# Altium PCB galileoAdapter.PcbDoc
Units mil, origin at the board's own origin, x right, y up, seen from the top; angles counter-clockwise.
Board outline 2650 x 2050 mil, 2 copper layers (Top Layer, Bottom Layer), stack 65.792 mil thick; 18 components, 32 nets, 671 pads, 0 vias.
Unrouted connection lines stored in the file: 5.
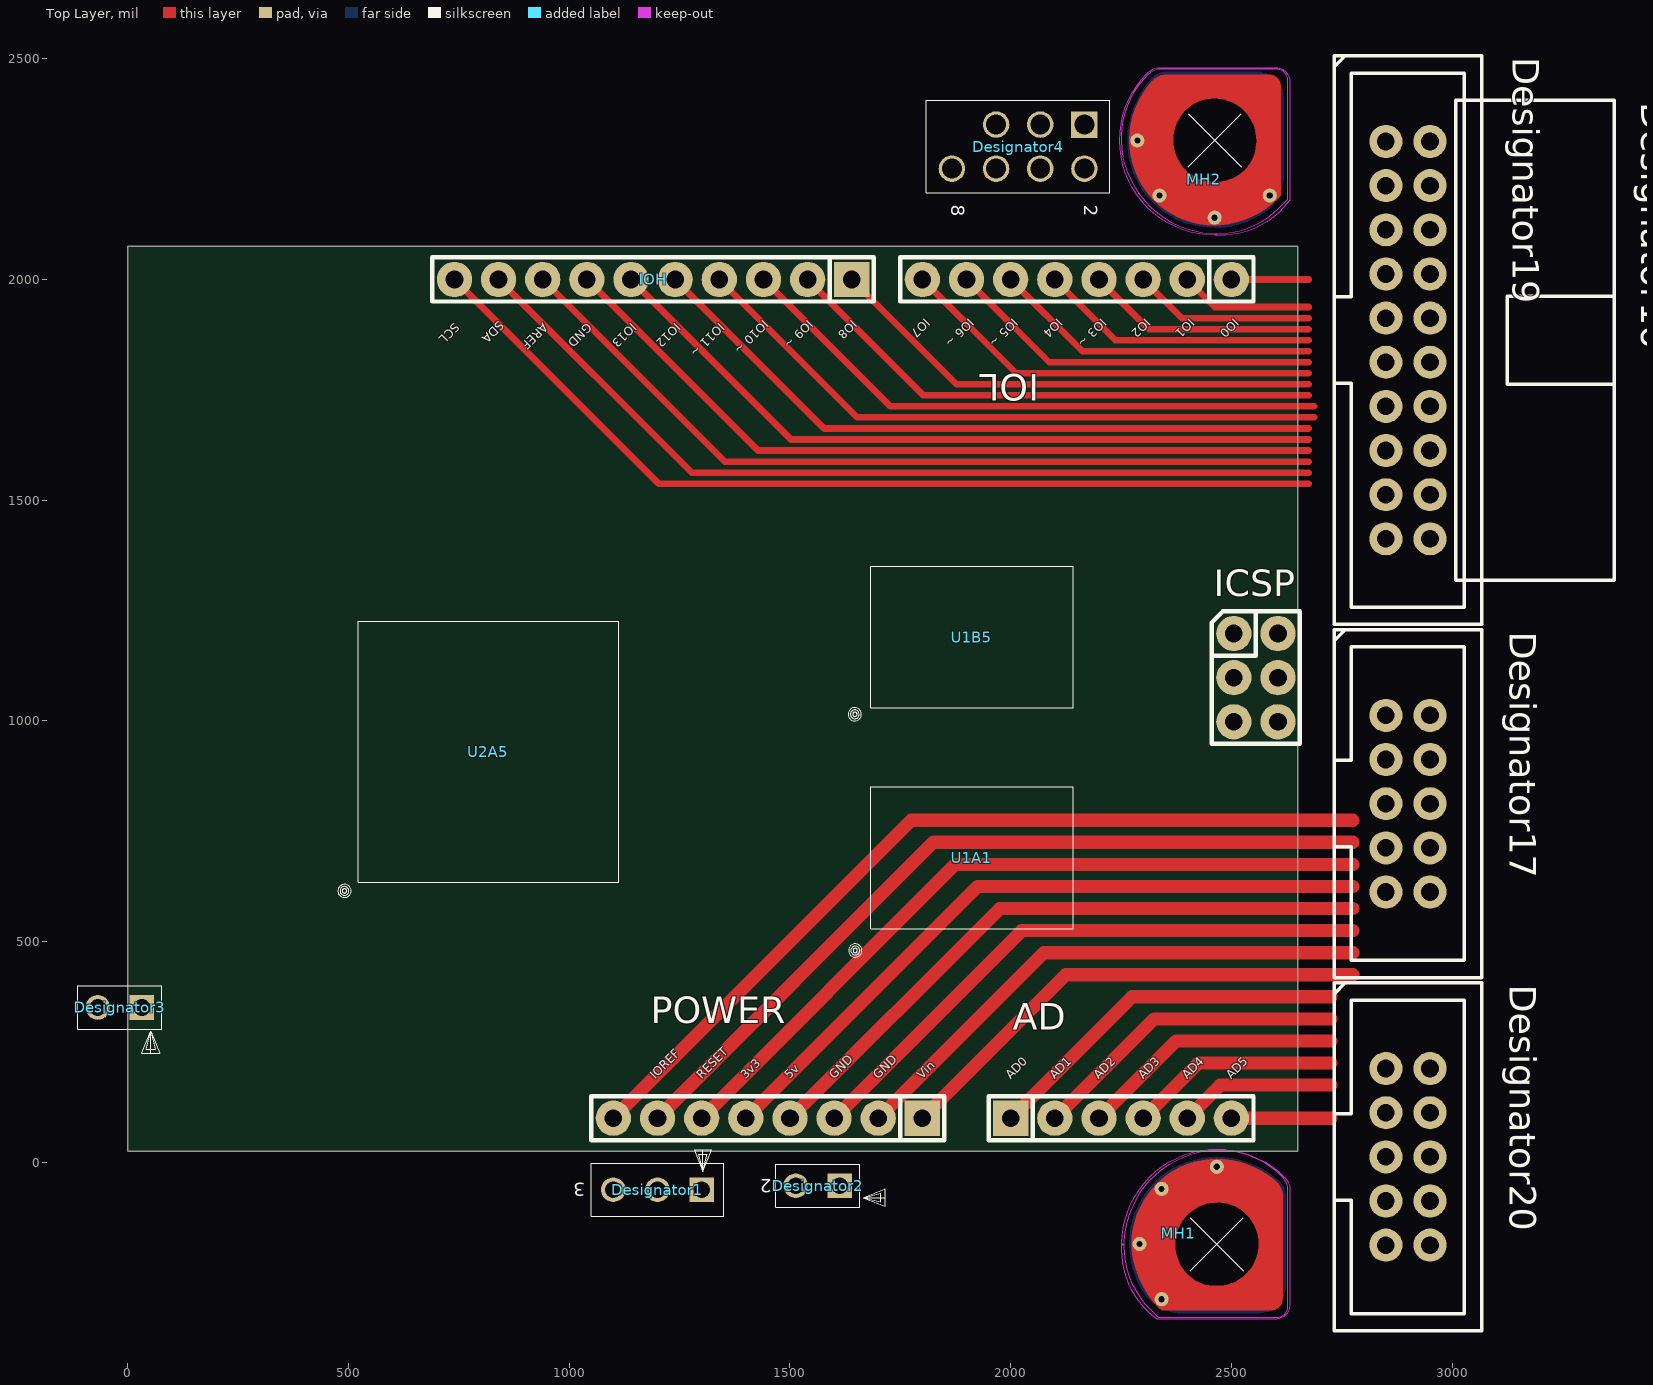
[diagram p0: Top Layer view]
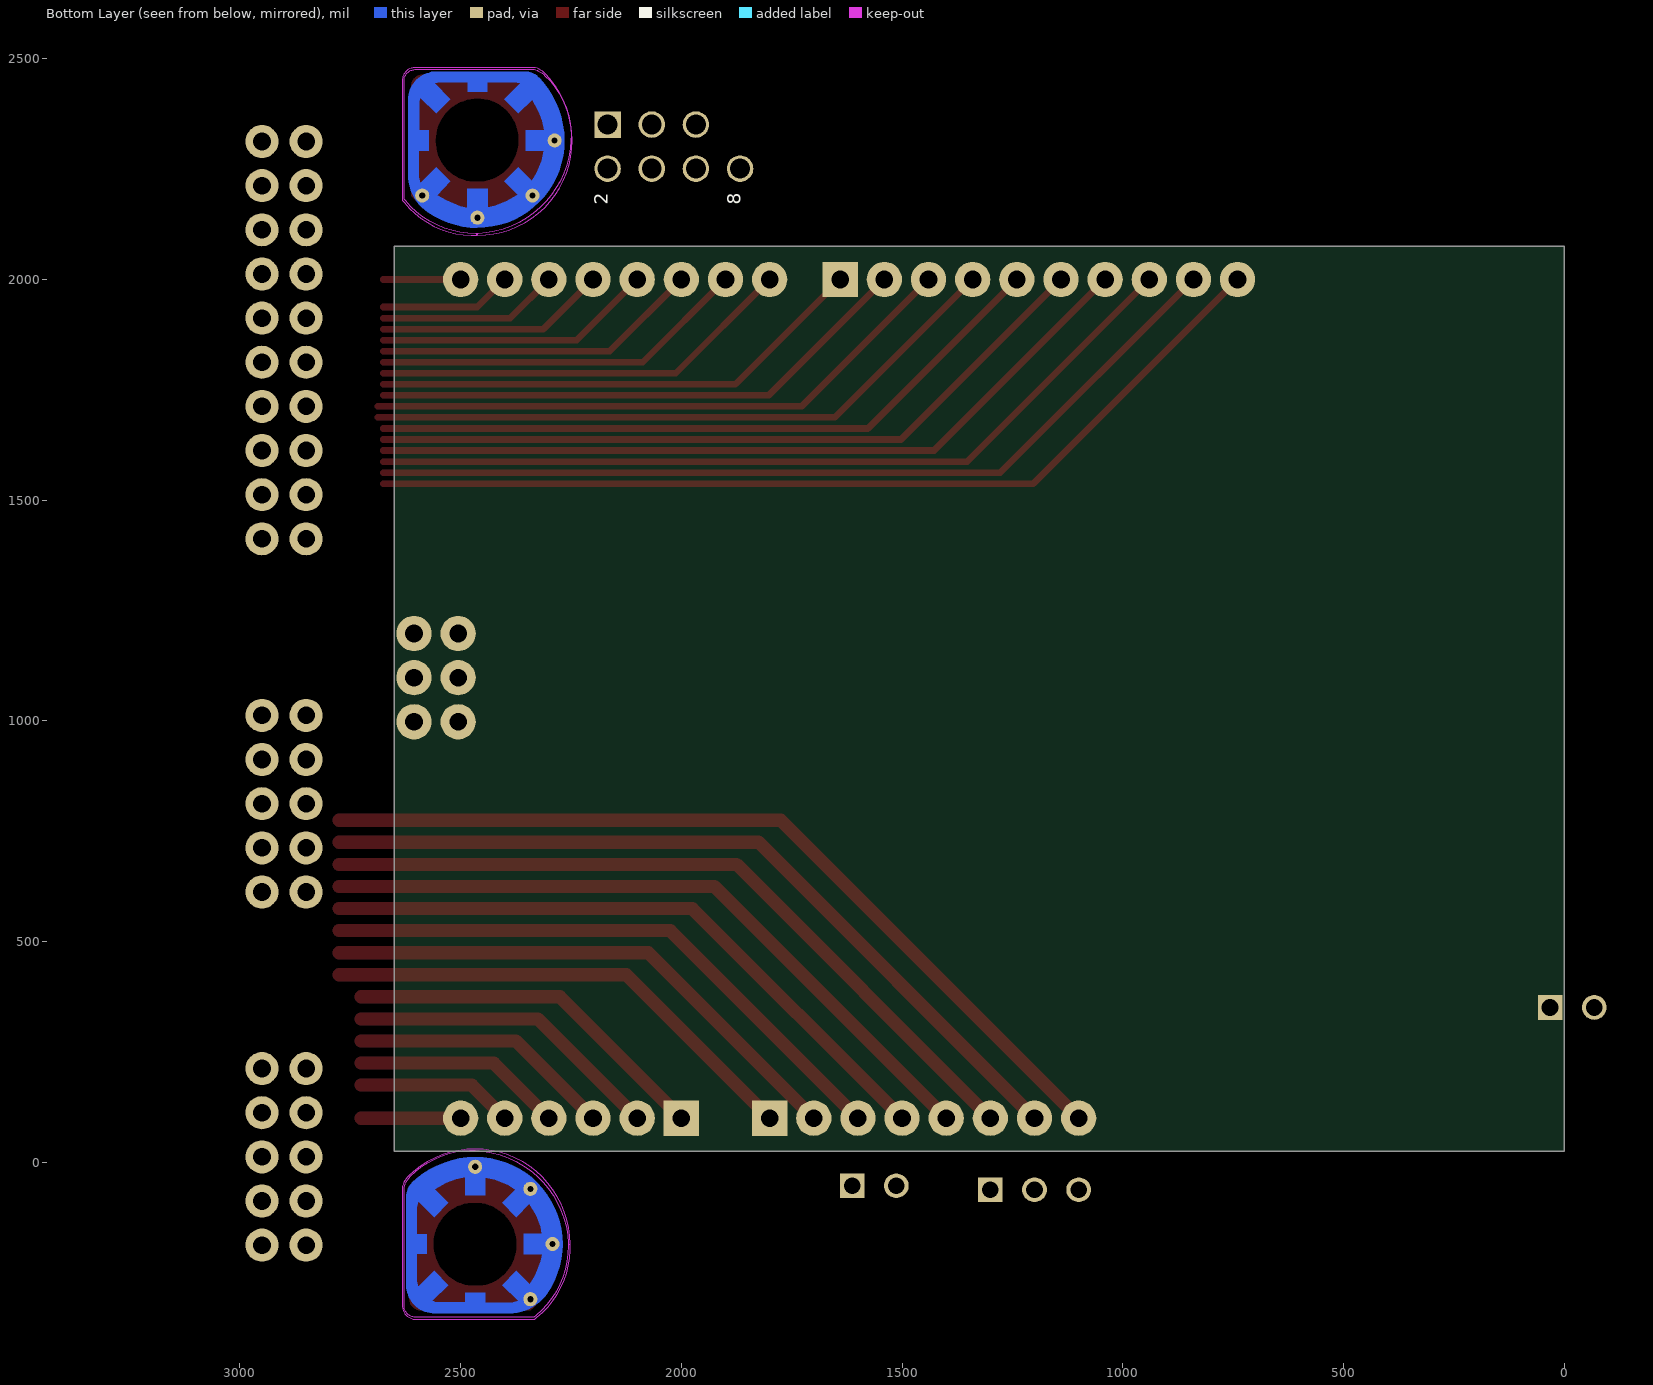
[diagram p1: Bottom Layer view, seen from below]

## Layer stack, top to bottom
Top Layer: signal copper 1.4
Dielectric: core 62.9921, FR-4, Dk 4.8
Bottom Layer: signal copper 1.4

## Board outline
0,25 0,2075 2650,2075 2650,25

## Design rules (kind name [scope] priority, off if disabled: settings)
Clearance [All] p1: gap=10
PolygonConnect [All] p1: connectstyle=Relief reliefconductorwidth=10 reliefentries=4 polygonreliefangle="90 Angle"
RoutingVias [All] p1: holewidth=28 width=50 viastyle="Through Hole" minholewidth=28 minwidth=50 maxholewidth=28 maxwidth=50
SilkscreenOverComponentPads [All] p1: minsilkscreentomaskgap=10
SolderMaskExpansion [All] p1: expansion=4
Width [All] p1: maxlimit=200 minlimit=10 preferedwidth=20
27 further rules are at their usual default settings.

## Classes and differential pairs
component class ArduinoUnoShield: AD ICSP IOH IOL POWER

## Components (designator, comment, footprint, x,y, rotation, side; value= is the part's Value field where it differs from the comment)
AD "AD" "Header 6x1 8.5mm" 2000,100 r0 top locked
Designator1 "1X3HDR_THLF-A91829-001" 102276-003 1197.5,-64.5 r270 top
Designator2 "1X2HDR_THLF-A91829-027" 102276-001 1563,-53 r270 top
Designator3 "1X2HDR_THLF-A91829-027" 102276-001 -18,351 r270 top
Designator4 "2X4HDR7_THLF-A91836-079" 2X4HDR7 2017,2301 r270 top
Designator16 "Comment" idc10x2_90 2850,2212.5 r270 top
Designator17 "Comment" IDC5x2 2900,812.5 r270 top
Designator19 "Comment" idc10x2 2900,1862.5 r270 top
Designator20 "Comment" IDC5x2 2900,12.5 r270 top
ICSP "ICSP" ICSP 2505.51,1198.03 r0 top locked
IOH "IOH" "Header 10x1 8.5mm" 1640,2000 r180 top locked
IOL "IOL" "Header 8x1 8.5mm"#1 2500,2000 r180 top locked
MH1 "MTG_HOLE_4V_THLF-SPOKE_N156_CNR_PKG_2_7" SPOKE_N156_CNR_PKG_2_7 2441.94,-162.46 r90 top
MH2 "MTG_HOLE_4V_THLF-SPOKE_N156_CNR_PKG_2_7" SPOKE_N156_CNR_PKG_2_7 2439.46,2289.94 r180 top
POWER "POWER_UNO" "Header 8x1 8.5mm"#2 1800,100 r180 top locked
U1A1 "MT41K128M8_FBGALF-G83568-001" FBGA78_8X11P5_8MM 1912,690 r90 top
U1B5 "MT41K128M8_FBGALF-G83568-001" FBGA78_8X11P5_8MM 1912,1190 r90 top
U2A5 "CLANTON_CUSTOMER_R1P2_BGALF-IPD031-201" BGA393_15X15MM 817,930 r270 top

## Footprints (in the part's own frame and the unit in brackets; to place one, negate y for a bottom-side part, rotate by r counter-clockwise, add the part's x,y. Pads: shape width x height; smd on the part's side, far side on the other; paste and mask are expansions set on the pad)
2X4HDR7 [mil] "2X4HDR7"
  rect 60x60 hole 45: 1(-50,150)
  round 60 hole 45: 2(50,150) 3(-50,50) 4(50,50) 5(-50,-50) 6(50,-50) 8(50,-150)
  silkscreen extent -140,-208 105,208
102276-001 [mil] "102276-001"
  rect 56x56 hole 38: 1(0,50)
  round 56 hole 38: 2(0,-50)
  silkscreen extent -49,-95 49,153
102276-003 [mil] "102276-003"
  rect 56x56 hole 38: 1(-2.5,102.5)
  round 56 hole 38: 2(-2.5,2.5) 3(-2.5,-97.5)
  silkscreen extent -93,-148 58,152
BGA393_15X15MM [mil] "BGA393_15X15MM"
  round 14 on Mech16: A2(256.54,-273.07) A34(-256.54,-273.07) AR1(273.07,256.54) AR35(-273.07,256.54) AT2(256.54,273.07) AT34(-256.54,273.07) B1(273.07,-256.54) B35(-273.07,-256.54)
  round 12 on Mech16: A4(233.19,-273.07) A32(-233.19,-273.07) AA2(258.41,38.01) AA4(230.18,38.01) AA10(130.44,47.02) AA26(-130.44,49.38) AA32(-230.18,38.01) AA34(-258.41,38.01) AB3(243.74,57.01) AB11(112,64) AB13(80,64) AB14(48,64) AB16(16,64) AB18(-16,64) AB20(-48,64) AB22(-80,64) AB24(-112,64) AB33(-243.74,57.01) AC2(258.41,76.02) AC4(230.18,76.02) AC5(206.74,71.67) AC7(178.74,71.67) AC9(150.74,71.67) AC27(-150.74,71.67) AC29(-178.74,71.67) AC30(-206.74,71.67) AC32(-230.18,76.02) AC34(-258.41,76.02) AD3(243.74,95.02) AD5(216.61,95.02) AD6(189.48,95.02) AD8(162.34,95.02) AD11(112,96) AD13(80,96) AD14(48,96) AD16(16,96) AD18(-16,96) AD20(-48,96) AD22(-80,96) AD24(-112,96) AD28(-162.34,95.02) AD29(-189.48,95.02) AD31(-216.61,95.02) AD33(-243.74,95.02) AE2(258.41,114.02) AE4(230.18,114.02) AE10(135.21,98.96) AE26(-135.21,98.96) AE32(-230.18,114.02) AE34(-258.41,114.02) AF11(112,128) AF13(80,128) AF14(48,128) AF16(16,128) AF18(-16,128) AF20(-48,128) AF22(-80,128) AF24(-112,128) AG3(243.74,133.03) AG6(198.6,138.8) AG30(-198.38,138.8) AG33(-243.74,133.03) AH2(258.41,152.03) AH4(230.18,152.03) AH7(179.76,152.96) AH11(120,150.2) AH12(94,150.2) AH15(34,150.2) AH17(0,156.6) AH19(-34,150.2) AH23(-94,150.2) AH25(-119.65,150.2) AH29(-179.58,152.96) AH32(-230.18,152.03) AH34(-258.41,152.03) AJ3(243.74,171.03) AJ6(198.6,166.8) AJ30(-198.38,166.8) AJ33(-243.74,171.03) AK2(258.41,190.04) AK4(230.18,190.04) AK7(179.76,180.96) AK11(120,178.2) AK12(94,178.2) AK15(34,178.2) AK17(0,179.95) AK19(-34,178.2) AK23(-94,178.2) AK25(-119.65,178.2) AK29(-179.58,180.96) AK32(-230.18,190.04) AK34(-258.41,190.04) AL6(198.6,194.8) AL11(120,206.2) AL12(94,206.2) AL15(34,206.2) AL17(0,203.29) AL19(-34,206.2) AL23(-94,206.2) AL25(-119.65,206.2) AL30(-198.38,194.8) AM2(252.48,221.12) AM4(230.18,213.38) AM7(179.76,208.96) AM29(-179.58,208.96) AM32(-230.18,213.38) AM33(-252.48,221.12) AN1(273.07,233.19) AN5(213.38,230.18) AN6(190.04,230.18) AN9(152.03,230.18) AN11(114.02,230.18) AN13(76.02,230.18) AN15(38.01,230.18) AN17(0,230.18) AN20(-38.01,230.18) AN22(-76.02,230.18) AN24(-114.02,230.18) AN27(-152.03,230.18) AN29(-190.04,230.18) AN31(-213.38,230.18) AN35(-273.07,233.19) AP2(250.51,250.47) AP4(221.12,252.44) AP7(171.03,243.74) AP10(133.03,243.74) AP12(95.02,243.74) AP14(57.01,243.74) AP16(19,243.74) AP18(-19,243.74) AP21(-57.01,243.74) AP23(-95.02,243.74) AP26(-133.03,243.74) AP28(-171.03,243.74) AP31(-221.12,252.44) AP33(-250.51,250.47) AR6(190.04,258.41) AR9(152.03,258.41) AR11(114.02,258.41) AR13(76.02,258.41) AR15(38.01,258.41) AR17(0,258.41) AR20(-38.01,258.41) AR22(-76.02,258.41) AR24(-114.02,258.41) AR27(-152.03,258.41) AR29(-190.04,258.41) AT3(233.19,273.07) AT32(-233.19,273.07) B2(250.51,-250.47) B4(220.72,-252.44) B6(190.04,-258.41) B9(152.03,-258.41) B11(114.02,-258.41) B13(76.02,-258.41) B15(38.01,-258.41) B17(0,-258.41) B20(-38.01,-258.41) B22(-76.02,-258.41) B24(-114.02,-258.41) B27(-152.03,-258.41) B29(-190.04,-258.41) B31(-221.12,-252.44) B33(-250.51,-250.47) C1(273.07,-233.19) C7(171.03,-243.74) C10(133.03,-243.74) C12(95.02,-243.74) C14(57.01,-243.74) C16(19,-243.74) C18(-19,-243.74) C21(-57.01,-243.74) C23(-95.02,-243.74) C26(-133.03,-243.74) C28(-171.03,-243.74) C35(-273.07,-233.19) D2(252.48,-221.12) D5(213.38,-230.18) D6(190.04,-230.18) D9(152.03,-230.18) D11(114.02,-230.18) D13(76.02,-230.18) D15(38.01,-230.18) D17(0,-230.18) D20(-38.01,-230.18) D22(-76.02,-230.18) D24(-114.02,-230.18) D27(-152.03,-230.18) D29(-190.04,-230.18) D31(-213.38,-230.18) D33(-252.48,-221.12) E4(230.18,-213.38) E7(179.58,-208.96) E11(119.65,-206.2) E12(94,-206.2) E15(34,-206.2) E17(0,-203.29) E19(-34,-206.2) E23(-94,-206.2) E25(-120,-206.2) E29(-179.76,-208.96) E32(-230.18,-213.38) F2(258.41,-190.04) F4(230.18,-190.04) F6(198.38,-194.8) F30(-198.6,-194.8) F32(-230.18,-190.04) F34(-258.41,-190.04) G3(243.74,-171.03) G7(179.58,-180.96) G11(119.65,-178.2) G12(94,-178.2) G15(34,-178.2) G17(0,-179.95) G19(-34,-178.2) G23(-94,-178.2) G25(-120,-178.2) G29(-179.76,-180.96) G33(-243.74,-171.03) H6(198.38,-166.8) H17(0,-156.6) H30(-198.6,-166.8) J2(258.41,-152.03) J4(230.18,-152.03) J6(198.38,-138.8) J7(179.58,-152.96) J11(119.65,-150.2) J12(94,-150.2) J15(34,-150.2) J19(-34,-150.2) J23(-94,-150.2) J25(-120,-150.2) J29(-179.76,-152.96) J30(-198.6,-138.8) J32(-230.18,-152.03) J34(-258.41,-152.03) K3(243.74,-133.03) K11(112,-128) K13(80,-128) K14(48,-128) K16(16,-128) K18(-16,-128) K20(-48,-128) K22(-80,-128) K24(-112,-128) K33(-243.74,-133.03) L2(258.41,-114.02) L4(230.18,-114.02) L32(-230.18,-114.02) L34(-258.41,-114.02) M3(243.74,-95.02) M5(216.61,-95.02) M6(189.48,-95.02) M8(162.34,-95.02) M11(112,-96) M13(80,-96) M14(48,-96) M16(16,-96) M18(-16,-96) M20(-48,-96) M22(-80,-96) M24(-112,-96) M26(-135.21,-98.96) M28(-162.34,-95.02) M29(-189.48,-95.02) M31(-216.61,-95.02) M33(-243.74,-95.02) N2(258.41,-76.02) N4(230.18,-76.02) N32(-230.18,-76.02) N34(-258.41,-76.02) P5(206.74,-71.67) P7(178.74,-71.67) P9(150.74,-71.67) P11(112,-64) P13(80,-64) P14(48,-64) P16(16,-64) P18(-16,-64) P20(-48,-64) P22(-80,-64) P24(-112,-64) P27(-150.74,-71.67) P29(-178.74,-71.67) P30(-206.74,-71.67) R3(243.74,-57.01) R10(130.44,-49.38) R26(-130.44,-47.02) R33(-243.74,-57.01) T2(258.41,-38.01) T4(230.18,-38.01) T11(112,-32) T13(80,-32) T14(48,-32) T16(16,-32) T18(-16,-32) T20(-48,-32) T22(-80,-32) T24(-112,-32) T32(-230.18,-38.01) T34(-258.41,-38.01) U3(243.74,-19) U33(-243.74,-19) V2(258.41,0) V4(230.18,0) V5(206.74,-11.67) V7(178.74,-11.67) V9(150.74,-11.67) V11(112,0) V13(80,0) V14(48,0) V16(16,0) V18(-16,0) V20(-48,0) V22(-80,0) V24(-112,0) V27(-150.74,-11.67) V29(-178.74,-11.67) V30(-206.74,-11.67) V32(-230.18,0) V34(-258.41,0) W3(243.74,19) W5(206.74,11.67) W7(178.74,11.67) W9(150.74,11.67) W27(-150.74,11.67) W29(-178.74,11.67) W30(-206.74,11.67) W33(-243.74,19) Y11(112,32) Y13(80,32) Y14(48,32) Y16(16,32) Y18(-16,32) Y20(-48,32) Y22(-80,32) Y24(-112,32)
  round 11 on Mech16: A5(209.54,-273.07) A31(-209.54,-273.07) AM1(273.07,209.54) AM35(-273.07,209.54) AT5(209.54,273.07) AT31(-209.54,273.07) E1(273.07,-209.54) E35(-273.07,-209.54)
  oval 10x13 on Mech16: A7(171.03,-273.07) A10(133.03,-273.07) A12(95.02,-273.07) A14(57.01,-273.07) A16(19,-273.07) A18(-19,-273.07) A21(-57.01,-273.07) A23(-95.02,-273.07) A26(-133.03,-273.07) A28(-171.03,-273.07) AT7(171.03,273.07) AT10(133.03,273.07) AT12(95.02,273.07) AT14(57.01,273.07) AT16(19,273.07) AT18(-19,273.07) AT21(-57.01,273.07) AT23(-95.02,273.07) AT26(-133.03,273.07) AT28(-171.03,273.07)
  oval 13x10 on Mech16: AB1(273.07,57.01) AB35(-273.07,57.01) AD1(273.07,95.02) AD35(-273.07,95.02) AG1(273.07,133.03) AG35(-273.07,133.03) AJ1(273.07,171.03) AJ35(-273.07,171.03) G1(273.07,-171.03) G35(-273.07,-171.03) K1(273.07,-133.03) K35(-273.07,-133.03) M1(273.07,-95.02) M35(-273.07,-95.02) R1(273.07,-57.01) R35(-273.07,-57.01) U1(273.07,-19) U35(-273.07,-19) W1(273.07,19) W35(-273.07,19)
  silkscreen extent -295,-341 330,295
FBGA78_8X11P5_8MM [mil] "FBGA78_8X11P5_8MM"
  round 18 on Mech16: A1(-125.98,188.98) A2(-94.49,188.98) A3(-62.99,188.98) A7(62.99,188.98) A8(94.49,188.98) A9(125.98,188.98) B1(-125.98,157.48) B2(-94.49,157.48) B3(-62.99,157.48) B7(62.99,157.48) B8(94.49,157.48) B9(125.98,157.48) C1(-125.98,125.98) C2(-94.49,125.98) C3(-62.99,125.98) C7(62.99,125.98) C8(94.49,125.98) C9(125.98,125.98) D1(-125.98,94.49) D2(-94.49,94.49) D3(-62.99,94.49) D7(62.99,94.49) D8(94.49,94.49) D9(125.98,94.49) E1(-125.98,62.99) E2(-94.49,62.99) E3(-62.99,62.99) E7(62.99,62.99) E8(94.49,62.99) E9(125.98,62.99) F1(-125.98,31.5) F2(-94.49,31.5) F3(-62.99,31.5) F7(62.99,31.5) F8(94.49,31.5) F9(125.98,31.5) G1(-125.98,0) G2(-94.49,0) G3(-62.99,0) G7(62.99,0) G8(94.49,0) G9(125.98,0) H1(-125.98,-31.5) H2(-94.49,-31.5) H3(-62.99,-31.5) H7(62.99,-31.5) H8(94.49,-31.5) H9(125.98,-31.5) J1(-125.98,-62.99) J2(-94.49,-62.99) J3(-62.99,-62.99) J7(62.99,-62.99) J8(94.49,-62.99) J9(125.98,-62.99) K1(-125.98,-94.49) K2(-94.49,-94.49) K3(-62.99,-94.49) K7(62.99,-94.49) K8(94.49,-94.49) K9(125.98,-94.49) L1(-125.98,-125.98) L2(-94.49,-125.98) L3(-62.99,-125.98) L7(62.99,-125.98) L8(94.49,-125.98) L9(125.98,-125.98) M1(-125.98,-157.48) M2(-94.49,-157.48) M3(-62.99,-157.48) M7(62.99,-157.48) M8(94.49,-157.48) M9(125.98,-157.48) N1(-125.98,-188.98) N2(-94.49,-188.98) N3(-62.99,-188.98) N7(62.99,-188.98) N8(94.49,-188.98) N9(125.98,-188.98)
  silkscreen extent -225,-229 160,279
"Header 6x1 8.5mm" [mil] "Stackable 6 pin header"
  rect 80x80 hole 40: 1(0,0)
  round 80 hole 40: 2(100,0) 3(200,0) 4(300,0) 5(400,0) 6(500,0)
  silkscreen extent -50,-50 550,50, body extent -50,-50 550,50, height 335
"Header 8x1 8.5mm"#1 [mil] "Stackable 8 pin header"
  round 80 hole 40: 1(0,0) 2(100,0) 3(200,0) 4(300,0) 5(400,0) 6(500,0) 7(600,0) 8(700,0)
  silkscreen extent -50,-50 750,50, body extent -50,-50 750,50, height 335
"Header 8x1 8.5mm"#2 [mil] "Stackable 8 pin header"
  rect 80x80 hole 40: 1(0,0)
  round 80 hole 40: 2(100,0) 3(200,0) 4(300,0) 5(400,0) 6(500,0) 7(600,0) 8(700,0)
  silkscreen extent -50,-50 750,50, body extent -50,-50 750,50, height 335
"Header 10x1 8.5mm" [mil] "Stackable 10 pin header"
  rect 80x80 hole 40: 1(0,0)
  round 80 hole 40: 2(100,0) 3(200,0) 4(300,0) 5(400,0) 6(500,0) 7(600,0) 8(700,0) 9(800,0) 10(900,0)
  silkscreen extent -50,-50 950,50, body extent -50,-50 950,50, height 335
ICSP [mil]
  round 80 hole 40: 1(0,0) 2(100,0) 3(0,-100) 4(100,-100) 5(0,-200) 6(100,-200)
  silkscreen extent -50,-250 150,50, body extent -50,-250 150,50, height 485
IDC5x2 [mil]
  round 75 hole 40: 1(-200,-50) 2(-200,50) 3(-100,-50) 4(-100,50) 5(0,-50) 6(0,50) 7(100,-50) 8(100,50) 9(200,-50) 10(200,50)
  silkscreen extent -394,-167 394,167, body extent -400,-169 400,180, height 117
idc10x2 [mil]
  round 75 hole 40: 1(-450,-50) 2(-450,50) 3(-350,-50) 4(-350,50) 5(-250,-50) 6(-250,50) 7(-150,-50) 8(-150,50) 9(-50,-50) 10(-50,50) 11(50,-50) 12(50,50) 13(150,-50) 14(150,50) 15(250,-50) 16(250,50) 17(350,-50) 18(350,50) 19(450,-50) 20(450,50)
  silkscreen extent -644,-167 644,167, body extent -650,-171 650,187, height 359
idc10x2_90 [mil]
  round 75 hole 40: 1(-100,0) 2(-100,100) 3(0,0) 4(0,100) 5(100,0) 6(100,100) 7(200,0) 8(200,100) 9(300,0) 10(300,100) 11(400,0) 12(400,100) 13(500,0) 14(500,100) 15(600,0) 16(600,100) 17(700,0) 18(700,100) 19(800,0) 20(800,100)
  silkscreen extent -194,158 894,517, body extent -199,-12 899,529, height 358
SPOKE_N156_CNR_PKG_2_7 [mil] "SPOKE_N156_CNR_PKG_2_7"
  round 40 hole 156: 1(-22.54,-25.06)
  round 32 hole 14: 3(-147.54,99.94) 4(-22.54,149.94) 5(102.46,99.94) 6(152.46,-25.06)
  Top Layer region: 156 vertices and 0 holes, not listed, extent -172.54,-174.06 170.46,167.94
  Top Layer keep-out region: -22.54,189.94 -22.54,189.94 -3.8,189.12 14.79,186.67 33.11,182.61 50.99,176.97 68.32,169.79 84.96,161.13 100.78,151.05 115.66,139.64 129.49,126.96 142.16,113.14 153.58,98.25 163.66,82.44 172.32,65.8 179.49,48.47 185.13,30.58 189.19,12.27 191.64,-6.33 192.46,-25.06 192.46,-25.06 191.63,-44.01 189.16,-62.81 185.05,-81.33 179.35,-99.42 172.09,-116.94 163.33,-133.76 153.14,-149.76 141.6,-164.8 131.46,-176.06 131.46,-176.06 128.22,-179.14 124.73,-181.91 121.01,-184.38 117.09,-186.51 113,-188.29 108.77,-189.71 107.46,-190.06 -160.54,-190.06 -160.54,-190.06 -163.34,-189.94 -166.12,-189.58 -168.86,-188.97 -171.53,-188.13 -174.12,-187.05 -176.6,-185.76 -178.97,-184.25 -181.19,-182.55 -183.26,-180.65 -185.15,-178.59 -186.86,-176.36 -188.36,-174 -189.66,-171.51 -190.73,-168.92 -191.57,-166.25 -192.18,-163.51 -192.55,-160.74 -192.67,-157.93 -192.55,-155.13 -192.54,-155.06 -192.54,109.94 -189.54,113.94 -189.54,113.94 -179.03,126.75 -167.43,138.6 -154.86,149.39 -141.38,159.05 -127.12,167.49 -112.18,174.66 -96.66,180.5 -80.7,184.97 -64.41,188.03 -47.91,189.65 -37.54,189.94 -24.54,189.94 -24.54,185.94 -27.54,185.94 -27.54,185.94 -45,185.17 -62.34,182.89 -79.4,179.11 -96.07,173.85 -112.22,167.16 -127.73,159.09 -142.47,149.7 -156.34,139.06 -169.23,127.25 -169.24,127.24 -188.54,107.94 -188.54,-161.06 -188.54,-161.06 -188.44,-163.24 -188.16,-165.41 -187.69,-167.53 -187.03,-169.61 -186.2,-171.63 -185.19,-173.56 -184.02,-175.4 -182.69,-177.13 -181.22,-178.74 -179.61,-180.22 -177.88,-181.54 -176.04,-182.71 -174.11,-183.72 -172.09,-184.56 -170.01,-185.21 -167.88,-185.68 -165.72,-185.97 -163.54,-186.06 106.46,-186.06 112.46,-184.06 112.46,-184.06 115.75,-182.8 118.91,-181.26 121.93,-179.45 124.78,-177.39 127.44,-175.08 127.46,-175.06 127.46,-175.06 139.53,-162.56 150.47,-149.06 160.18,-134.65 168.61,-119.46 175.68,-103.58 181.33,-87.15 185.54,-70.29 188.26,-53.13 189.47,-35.79 189.46,-25.06 189.46,-25.06 188.11,-6.17 185.12,12.53 180.51,30.89 174.31,48.79 166.58,66.08 157.38,82.63 146.76,98.31 134.82,113.01 121.64,126.61 107.33,139.01 91.99,150.12 75.75,159.85 58.71,168.12 41.02,174.88 22.81,180.07 4.21,183.66 -14.62,185.61 -22.54,185.94 -22.54,189.94
  Bottom Layer region: -22.54,172.94 -22.54,172.94 -5.37,172.19 11.67,169.94 28.45,166.22 44.84,161.06 60.72,154.48 75.96,146.54 90.45,137.31 104.09,126.85 116.76,115.24 128.37,102.57 138.83,88.93 148.07,74.44 156,59.19 162.58,43.31 167.75,26.92 171.47,10.14 173.71,-6.89 174.46,-24.06 174.46,-25.06 174.46,-25.06 173.68,-42.96 171.34,-60.73 167.46,-78.22 162.07,-95.31 155.22,-111.86 146.94,-127.75 137.32,-142.86 126.41,-157.08 117.46,-167.06 117.46,-167.06 114.6,-169.81 111.5,-172.29 108.2,-174.5 104.73,-176.41 101.1,-178 97.34,-179.28 93.49,-180.23 89.57,-180.83 86.46,-181.06 -115.54,-181.06 -115.54,-181.06 -121.12,-180.82 -126.65,-180.09 -132.1,-178.88 -137.43,-177.2 -142.59,-175.07 -147.54,-172.49 -152.25,-169.49 -156.68,-166.09 -160.79,-162.32 -164.57,-158.2 -167.97,-153.77 -170.97,-149.06 -173.54,-144.11 -175.68,-138.95 -177.36,-133.63 -178.57,-128.18 -179.3,-122.64 -179.54,-117.06 -179.54,51.94 -179.54,51.94 -179.14,61.06 -177.95,70.11 -175.97,79.03 -173.23,87.74 -169.73,96.17 -165.52,104.28 -160.61,111.98 -155.05,119.22 -148.88,125.95 -142.15,132.12 -134.9,137.68 -134.54,137.94 -134.54,137.94 -120.07,147.07 -104.86,154.91 -89.02,161.4 -72.68,166.48 -55.96,170.11 -38.99,172.28 -25.54,172.94 -24.54,172.94 -24.54,84.94 -45.54,84.94 -45.54,126.94 -61.54,123.94 -93.54,110.94 -113.54,98.94 -83.54,67.94 -115.54,35.94 -151.54,71.94 -155.54,56.94 -155.54,-2.06 -132.54,-2.06 -132.54,-48.06 -154.54,-48.06 -154.54,-113.06 -151.54,-122.06 -115.54,-86.06 -83.54,-118.06 -119.54,-154.06 -106.54,-157.06 -44.54,-157.06 -44.54,-135.06 -0.54,-135.06 -0.54,-157.06 59.46,-157.06 74.46,-154.06 38.46,-118.06 70.46,-86.06 101.46,-117.06 116.46,-90.06 124.46,-69.06 128.46,-48.06 87.46,-48.06 87.46,-2.06 127.46,-2.06 123.46,20.94 110.46,50.94 100.46,65.94 70.46,35.94 38.46,67.94 68.46,97.94 42.46,112.94 16.46,122.94 0.46,125.94 0.46,84.94 -22.54,84.94 -22.54,172.94
  Bottom Layer keep-out region: -22.54,189.94 -22.54,189.94 -3.8,189.12 14.79,186.67 33.11,182.61 50.99,176.97 68.32,169.79 84.96,161.13 100.78,151.05 115.66,139.64 129.49,126.96 142.16,113.14 153.58,98.25 163.66,82.44 172.32,65.8 179.49,48.47 185.13,30.58 189.19,12.27 191.64,-6.33 192.46,-25.06 192.46,-25.06 191.63,-44.02 189.16,-62.83 185.05,-81.36 179.34,-99.45 172.08,-116.98 163.32,-133.81 153.13,-149.82 141.57,-164.87 132.46,-175.06 132.46,-175.06 129.01,-178.38 125.29,-181.38 121.32,-184.05 117.14,-186.36 112.76,-188.29 108.24,-189.84 107.46,-190.06 -162.54,-190.06 -162.54,-190.06 -165.19,-189.95 -167.81,-189.6 -170.4,-189.03 -172.92,-188.23 -175.37,-187.22 -177.72,-186 -179.95,-184.57 -182.05,-182.96 -184.01,-181.17 -185.79,-179.22 -187.41,-177.12 -188.83,-174.89 -190.05,-172.54 -191.07,-170.09 -191.86,-167.56 -192.44,-164.98 -192.78,-162.35 -192.9,-159.71 -192.78,-157.06 -192.54,-155.06 -192.54,109.94 -188.54,114.94 -188.54,114.94 -177.04,128.09 -164.44,140.19 -150.84,151.14 -136.33,160.87 -121.02,169.3 -105.04,176.36 -88.51,182 -71.55,186.17 -54.29,188.86 -36.86,190.03 -24.54,189.94 -24.54,185.94 -26.54,185.94 -26.54,185.94 -44.6,185.15 -62.53,182.79 -80.18,178.87 -97.42,173.44 -114.12,166.52 -130.16,158.17 -145.4,148.46 -159.75,137.45 -173.07,125.24 -185.29,111.91 -188.54,107.94 -188.54,-160.06 -188.54,-160.06 -188.44,-162.33 -188.14,-164.58 -187.65,-166.79 -186.97,-168.96 -186.1,-171.05 -185.06,-173.06 -183.84,-174.98 -182.46,-176.78 -180.92,-178.45 -179.25,-179.98 -177.45,-181.36 -175.54,-182.58 -173.53,-183.63 -171.43,-184.5 -169.27,-185.18 -167.05,-185.67 -164.81,-185.97 -162.54,-186.06 106.46,-186.06 109.46,-185.06 109.46,-185.06 113.2,-183.63 114.46,-183.06 114.46,-183.06 119.08,-180.64 123.47,-177.83 127.6,-174.64 130.46,-172.06 130.46,-172.06 142.06,-159.91 152.55,-146.79 161.86,-132.8 169.92,-118.06 176.66,-102.67 182.03,-86.75 185.99,-70.42 188.52,-53.81 189.59,-37.05 189.46,-25.06 189.46,-25.06 187.81,-5.91 184.51,13.04 179.56,31.62 173.01,49.7 164.91,67.14 155.32,83.81 144.32,99.57 131.98,114.32 118.41,127.94 103.7,140.33 87.96,151.38 71.33,161.02 53.91,169.18 35.85,175.78 17.29,180.79 -1.64,184.16 -20.8,185.86 -22.54,185.94 -22.54,189.94
  silkscreen extent -83,-85 37,35

## Nets (pads, with @x,y where several pads share a name; then routed paths per layer and width w, separated by ;. In a path a pad name is that pad's centre, name@x,y a point inside that pad or via, vN(x,y) a via of type N, cw(c..) or ccw(c..) an arc to the next point about the centre after c; other vN are vias at no path point)
3V3: POWER.5 | length 1592.5
  Top Layer w30: POWER.5 1925,625 2775,625
5V: ICSP.2 POWER.4 | length 1471.8
  Top Layer w30: POWER.4 1975,575 2775,575
AD0: AD.1 | length 838.9
  Top Layer w30: AD.1 2275,375 2725,375
AD1: AD.2 | length 718.2
  Top Layer w30: AD.2 2325,325 2725,325
AD2: AD.3 | length 597.5
  Top Layer w30: AD.3 2375,275 2725,275
AD3: AD.4 | length 476.8
  Top Layer w30: AD.4 2425,225 2725,225
AD4: AD.5 | length 356.1
  Top Layer w30: AD.5 2475,175 2725,175
AD5: AD.6 | length 225
  Top Layer w30: AD.6 2725,100
AREF: IOH.8 | length 1905.9
  Top Layer w15: IOH.8 1352.5,1587.5 2675,1587.5
GND: ICSP.6 IOH.7 POWER.2 POWER.3 | length 4376.9
  Top Layer w15: IOH.7 1427.5,1612.5 2675,1612.5
  Top Layer w30: POWER.3 2025,525 2775,525 ; POWER.2 2075,475 2775,475
IO0: IOL.1 | length 175
  Top Layer w15: IOL.1 2675,2000
IO1: IOL.2 | length 300.9
  Top Layer w15: IOL.2 2462.5,1937.5 2675,1937.5
IO2: IOL.3 | length 411.2
  Top Layer w15: IOL.3 2387.5,1912.5 2675,1912.5
IO3: IOL.4 | length 521.6
  Top Layer w15: IOL.4 2312.5,1887.5 2675,1887.5
IO4: IOL.5 | length 632
  Top Layer w15: IOL.5 2237.5,1862.5 2675,1862.5
IO5: IOL.6 | length 742.3
  Top Layer w15: IOL.6 2162.5,1837.5 2675,1837.5
IO6: IOL.7 | length 852.7
  Top Layer w15: IOL.7 2087.5,1812.5 2675,1812.5
IO7: IOL.8 | length 963
  Top Layer w15: IOL.8 2012.5,1787.5 2675,1787.5
IO8: IOH.1 | length 1133.4
  Top Layer w15: IOH.1 1877.5,1762.5 2675,1762.5
IO9: IOH.2 | length 1243.7
  Top Layer w15: IOH.2 1802.5,1737.5 2675,1737.5
IO10: IOH.3 | length 1366.6
  Top Layer w15: IOH.3 1727.5,1712.5 2687.5,1712.5
IO11: IOH.4 | length 1476.9
  Top Layer w15: IOH.4 1652.5,1687.5 2687.5,1687.5
IO12: IOH.5 | length 1574.8
  Top Layer w15: IOH.5 1577.5,1662.5 2675,1662.5
IO13: IOH.6 | length 1685.2
  Top Layer w15: IOH.6 1502.5,1637.5 2675,1637.5
IOREF: POWER.7 | length 1833.9
  Top Layer w30: POWER.7 1825,725 2775,725
MISO: ICSP.1
MOSI: ICSP.4
RESET: ICSP.5 POWER.6 | length 1713.2
  Top Layer w30: POWER.6 1875,675 2775,675
SCK: ICSP.3
SCL: IOH.10 | length 2126.6
  Top Layer w15: IOH.10 1202.5,1537.5 2675,1537.5
SDA: IOH.9 | length 2016.2
  Top Layer w15: IOH.9 1277.5,1562.5 2675,1562.5
VIN: POWER.1 | length 1109.6
  Top Layer w30: POWER.1 2125,425 2775,425
pads on no net: Designator1.1 Designator1.2 Designator1.3 Designator2.1 Designator2.2 Designator3.1 Designator3.2 Designator4.1 Designator4.2 Designator4.3 Designator4.4 Designator4.5 Designator4.6 Designator4.8 Designator16.1 Designator16.2 Designator16.3 Designator16.4 Designator16.5 Designator16.6 Designator16.7 Designator16.8 Designator16.9 Designator16.10 Designator16.11 Designator16.12 Designator16.13 Designator16.14 Designator16.15 Designator16.16 Designator16.17 Designator16.18 Designator16.19 Designator16.20 Designator17.1 Designator17.2 Designator17.3 Designator17.4 Designator17.5 Designator17.6 Designator17.7 Designator17.8 Designator17.9 Designator17.10 Designator19.1 Designator19.2 Designator19.3 Designator19.4 Designator19.5 Designator19.6 Designator19.7 Designator19.8 Designator19.9 Designator19.10 Designator19.11 Designator19.12 Designator19.13 Designator19.14 Designator19.15 Designator19.16 Designator19.17 Designator19.18 Designator19.19 Designator19.20 Designator20.1 Designator20.2 Designator20.3 Designator20.4 Designator20.5 Designator20.6 Designator20.7 Designator20.8 Designator20.9 Designator20.10 MH1.1 MH1.3 MH1.4 MH1.5 MH1.6 MH2.1 MH2.3 MH2.4 MH2.5 MH2.6 POWER.8 U1A1.A1 U1A1.A2 U1A1.A3 U1A1.A7 U1A1.A8 U1A1.A9 U1A1.B1 U1A1.B2 U1A1.B3 U1A1.B7 U1A1.B8 U1A1.B9 U1A1.C1 U1A1.C2 U1A1.C3 U1A1.C7 U1A1.C8 U1A1.C9 U1A1.D1 U1A1.D2 U1A1.D3 U1A1.D7 U1A1.D8 U1A1.D9 U1A1.E1 U1A1.E2 U1A1.E3 U1A1.E7 U1A1.E8 U1A1.E9 U1A1.F1 U1A1.F2 U1A1.F3 U1A1.F7 U1A1.F8 U1A1.F9 U1A1.G1 U1A1.G2 U1A1.G3 U1A1.G7 U1A1.G8 U1A1.G9 U1A1.H1 U1A1.H2 U1A1.H3 U1A1.H7 U1A1.H8 U1A1.H9 U1A1.J1 U1A1.J2 U1A1.J3 U1A1.J7 U1A1.J8 U1A1.J9 U1A1.K1 U1A1.K2 U1A1.K3 U1A1.K7 U1A1.K8 U1A1.K9 U1A1.L1 U1A1.L2 U1A1.L3 U1A1.L7 U1A1.L8 U1A1.L9 U1A1.M1 U1A1.M2 U1A1.M3 U1A1.M7 U1A1.M8 U1A1.M9 U1A1.N1 U1A1.N2 U1A1.N3 U1A1.N7 U1A1.N8 U1A1.N9 U1B5.A1 U1B5.A2 U1B5.A3 U1B5.A7 U1B5.A8 U1B5.A9 U1B5.B1 U1B5.B2 U1B5.B3 U1B5.B7 U1B5.B8 U1B5.B9 U1B5.C1 U1B5.C2 U1B5.C3 U1B5.C7 U1B5.C8 U1B5.C9 U1B5.D1 U1B5.D2 U1B5.D3 U1B5.D7 U1B5.D8 U1B5.D9 U1B5.E1 U1B5.E2 U1B5.E3 U1B5.E7 U1B5.E8 U1B5.E9 U1B5.F1 U1B5.F2 U1B5.F3 U1B5.F7 U1B5.F8 U1B5.F9 U1B5.G1 U1B5.G2 U1B5.G3 U1B5.G7 U1B5.G8 U1B5.G9 U1B5.H1 U1B5.H2 U1B5.H3 U1B5.H7 U1B5.H8 U1B5.H9 U1B5.J1 U1B5.J2 U1B5.J3 U1B5.J7 U1B5.J8 U1B5.J9 U1B5.K1 U1B5.K2 U1B5.K3 U1B5.K7 U1B5.K8 U1B5.K9 U1B5.L1 U1B5.L2 U1B5.L3 U1B5.L7 U1B5.L8 U1B5.L9 U1B5.M1 U1B5.M2 U1B5.M3 U1B5.M7 U1B5.M8 U1B5.M9 U1B5.N1 U1B5.N2 U1B5.N3 U1B5.N7 U1B5.N8 U1B5.N9 U2A5.A2 U2A5.A4 U2A5.A5 U2A5.A7 U2A5.A10 U2A5.A12 U2A5.A14 U2A5.A16 U2A5.A18 U2A5.A21 U2A5.A23 U2A5.A26 U2A5.A28 U2A5.A31 U2A5.A32 U2A5.A34 U2A5.AA2 U2A5.AA4 U2A5.AA10 U2A5.AA26 U2A5.AA32 U2A5.AA34 U2A5.AB1 U2A5.AB3 U2A5.AB11 U2A5.AB13 U2A5.AB14 U2A5.AB16 U2A5.AB18 U2A5.AB20 U2A5.AB22 U2A5.AB24 U2A5.AB33 U2A5.AB35 U2A5.AC2 U2A5.AC4 U2A5.AC5 U2A5.AC7 U2A5.AC9 U2A5.AC27 U2A5.AC29 U2A5.AC30 U2A5.AC32 U2A5.AC34 U2A5.AD1 U2A5.AD3 U2A5.AD5 U2A5.AD6 U2A5.AD8 U2A5.AD11 U2A5.AD13 U2A5.AD14 U2A5.AD16 U2A5.AD18 U2A5.AD20 U2A5.AD22 U2A5.AD24 U2A5.AD28 U2A5.AD29 U2A5.AD31 U2A5.AD33 U2A5.AD35 U2A5.AE2 U2A5.AE4 U2A5.AE10 U2A5.AE26 U2A5.AE32 U2A5.AE34 U2A5.AF11 U2A5.AF13 U2A5.AF14 U2A5.AF16 U2A5.AF18 U2A5.AF20 U2A5.AF22 U2A5.AF24 U2A5.AG1 U2A5.AG3 U2A5.AG6 U2A5.AG30 U2A5.AG33 U2A5.AG35 U2A5.AH2 U2A5.AH4 U2A5.AH7 U2A5.AH11 U2A5.AH12 U2A5.AH15 U2A5.AH17 U2A5.AH19 U2A5.AH23 U2A5.AH25 U2A5.AH29 U2A5.AH32 U2A5.AH34 U2A5.AJ1 U2A5.AJ3 U2A5.AJ6 U2A5.AJ30 U2A5.AJ33 U2A5.AJ35 U2A5.AK2 U2A5.AK4 U2A5.AK7 U2A5.AK11 U2A5.AK12 U2A5.AK15 U2A5.AK17 U2A5.AK19 U2A5.AK23 U2A5.AK25 U2A5.AK29 U2A5.AK32 U2A5.AK34 U2A5.AL6 U2A5.AL11 U2A5.AL12 U2A5.AL15 U2A5.AL17 U2A5.AL19 U2A5.AL23 U2A5.AL25 U2A5.AL30 U2A5.AM1 U2A5.AM2 U2A5.AM4 U2A5.AM7 U2A5.AM29 U2A5.AM32 U2A5.AM33 U2A5.AM35 U2A5.AN1 U2A5.AN5 U2A5.AN6 U2A5.AN9 U2A5.AN11 U2A5.AN13 U2A5.AN15 U2A5.AN17 U2A5.AN20 U2A5.AN22 U2A5.AN24 U2A5.AN27 U2A5.AN29 U2A5.AN31 U2A5.AN35 U2A5.AP2 U2A5.AP4 U2A5.AP7 U2A5.AP10 U2A5.AP12 U2A5.AP14 U2A5.AP16 U2A5.AP18 U2A5.AP21 U2A5.AP23 U2A5.AP26 U2A5.AP28 U2A5.AP31 U2A5.AP33 U2A5.AR1 U2A5.AR6 U2A5.AR9 U2A5.AR11 U2A5.AR13 U2A5.AR15 U2A5.AR17 U2A5.AR20 U2A5.AR22 U2A5.AR24 U2A5.AR27 U2A5.AR29 U2A5.AR35 U2A5.AT2 U2A5.AT3 U2A5.AT5 U2A5.AT7 U2A5.AT10 U2A5.AT12 U2A5.AT14 U2A5.AT16 U2A5.AT18 U2A5.AT21 U2A5.AT23 U2A5.AT26 U2A5.AT28 U2A5.AT31 U2A5.AT32 U2A5.AT34 U2A5.B1 U2A5.B2 U2A5.B4 U2A5.B6 U2A5.B9 U2A5.B11 U2A5.B13 U2A5.B15 U2A5.B17 U2A5.B20 U2A5.B22 U2A5.B24 U2A5.B27 U2A5.B29 U2A5.B31 U2A5.B33 U2A5.B35 U2A5.C1 U2A5.C7 U2A5.C10 U2A5.C12 U2A5.C14 U2A5.C16 U2A5.C18 U2A5.C21 U2A5.C23 U2A5.C26 U2A5.C28 U2A5.C35 U2A5.D2 U2A5.D5 U2A5.D6 U2A5.D9 U2A5.D11 U2A5.D13 U2A5.D15 U2A5.D17 U2A5.D20 U2A5.D22 U2A5.D24 U2A5.D27 U2A5.D29 U2A5.D31 U2A5.D33 U2A5.E1 U2A5.E4 U2A5.E7 U2A5.E11 U2A5.E12 U2A5.E15 U2A5.E17 U2A5.E19 U2A5.E23 U2A5.E25 U2A5.E29 U2A5.E32 U2A5.E35 U2A5.F2 U2A5.F4 U2A5.F6 U2A5.F30 U2A5.F32 U2A5.F34 U2A5.G1 U2A5.G3 U2A5.G7 U2A5.G11 U2A5.G12 U2A5.G15 U2A5.G17 U2A5.G19 U2A5.G23 U2A5.G25 U2A5.G29 U2A5.G33 U2A5.G35 U2A5.H6 U2A5.H17 U2A5.H30 U2A5.J2 U2A5.J4 U2A5.J6 U2A5.J7 U2A5.J11 U2A5.J12 U2A5.J15 U2A5.J19 U2A5.J23 U2A5.J25 U2A5.J29 U2A5.J30 U2A5.J32 U2A5.J34 U2A5.K1 U2A5.K3 U2A5.K11 U2A5.K13 U2A5.K14 U2A5.K16 U2A5.K18 U2A5.K20 U2A5.K22 U2A5.K24 U2A5.K33 U2A5.K35 U2A5.L2 U2A5.L4 U2A5.L32 U2A5.L34 U2A5.M1 U2A5.M3 U2A5.M5 U2A5.M6 U2A5.M8 U2A5.M11 U2A5.M13 U2A5.M14 U2A5.M16 U2A5.M18 U2A5.M20 U2A5.M22 U2A5.M24 U2A5.M26 U2A5.M28 U2A5.M29 U2A5.M31 U2A5.M33 U2A5.M35 U2A5.N2 U2A5.N4 U2A5.N32 U2A5.N34 U2A5.P5 U2A5.P7 U2A5.P9 U2A5.P11 U2A5.P13 U2A5.P14 U2A5.P16 U2A5.P18 U2A5.P20 U2A5.P22 U2A5.P24 U2A5.P27 U2A5.P29 U2A5.P30 U2A5.R1 U2A5.R3 U2A5.R10 U2A5.R26 U2A5.R33 U2A5.R35 U2A5.T2 U2A5.T4 U2A5.T11 U2A5.T13 U2A5.T14 U2A5.T16 U2A5.T18 U2A5.T20 U2A5.T22 U2A5.T24 U2A5.T32 U2A5.T34 U2A5.U1 U2A5.U3 U2A5.U33 U2A5.U35 U2A5.V2 U2A5.V4 U2A5.V5 U2A5.V7 U2A5.V9 U2A5.V11 U2A5.V13 U2A5.V14 U2A5.V16 U2A5.V18 U2A5.V20 U2A5.V22 U2A5.V24 U2A5.V27 U2A5.V29 U2A5.V30 U2A5.V32 U2A5.V34 U2A5.W1 U2A5.W3 U2A5.W5 U2A5.W7 U2A5.W9 U2A5.W27 U2A5.W29 U2A5.W30 U2A5.W33 U2A5.W35 U2A5.Y11 U2A5.Y13 U2A5.Y14 U2A5.Y16 U2A5.Y18 U2A5.Y20 U2A5.Y22 U2A5.Y24
copper on no net: | length 1954.6
  Top Layer w30: 1100,100 1725,725 1775,775 2775,775

## Other copper
Multi-Layer:
  pour cut-out: 1225,610 1000,610 1000,600 1043,557 1043,533 1032,522 979,522 935,478 771,478 756,493 756,598 744,610 553,610 464,699 464,881 421,881 411,891 411,981 464,1034 464,1111 576,1223 698,1223 698,1275 644,1329 644,1409 638,1415 604,1415 592,1427 592,1545 611,1564 690,1564 710,1544 710,1367 796,1281 808,1281 819,1270 819,1223 918,1223 918,1261 791,1388 791,1469 799,1477 853,1477 865,1465 865,1372 904,1333 997,1333 1054,1276 1090,1240 1090,1223 1158,1223 1268,1113 1333,1048 1333,825 1268,760 1268,653 1225,610

## Silkscreen, mask and mechanical layers (free items; w line width, h text height)
Top Overlay:
  text "IO7" at 1805,1912.93 h20 r225
  text "IO6 ~" at 1905,1912.93 h20 r225
  text "IO5 ~" at 2005,1912.93 h20 r225
  text "IO4" at 2105,1912.93 h20 r225
  text "IO3 ~" at 2205,1912.93 h20 r225
  text "IO2" at 2305,1912.93 h20 r225
  text "IO1" at 2405,1912.93 h20 r225
  text "IO0" at 2505,1912.93 h20 r225
  text "IO10 ~" at 1440,1910 h20 r225
  text "IO9 ~" at 1540,1910 h20 r225
  text "IO8" at 1640,1910 h20 r225
  text "SDA" at 840,1907.93 h20 r225
  text "SCL" at 740,1902.93 h20 r225
  text "AREF" at 940,1902.93 h20 r225
  text "GND" at 1040,1902.93 h20 r225
  text "IO13" at 1140,1902.93 h20 r225
  text "IO12" at 1240,1902.93 h20 r225
  text "IO11 ~" at 1340,1902.93 h20 r225
  text "IOREF" at 1195,187.07 h20 r45
  text "RESET" at 1300,187.07 h20 r45
  text "3v3" at 1400,187.07 h20 r45
  text "5v" at 1500,187.07 h20 r45
  text "GND" at 1600,187.07 h20 r45
  text "GND" at 1700,187.07 h20 r45
  text "Vin" at 1800,187.07 h20 r45
  text "AD0" at 2000,187.07 h20 r45
  text "AD1" at 2100,187.07 h20 r45
  text "AD2" at 2200,187.07 h20 r45
  text "AD3" at 2300,187.07 h20 r45
  text "AD4" at 2400,187.07 h20 r45
  text "AD5" at 2500,187.07 h20 r45
  text "RESET" at 1295,-2515 h20 r45
  text "3v3" at 1395,-2515 h20 r45
  text "5v" at 1495,-2515 h20 r45
  text "GND" at 1595,-2515 h20 r45
  text "GND" at 1695,-2515 h20 r45
  text "Vin" at 1795,-2515 h20 r45
Mechanical 1:
  lines w5: 0,25 0,2075 2500,2075 2650,2075 2650,1600 2650,1500 2650,150 2650,25 2600,25 0,25
Mechanical 6:
  lines w10: 2632,-354 3241.5,-354 3362.5,-354 3362.5,2480 3241.5,2480 2632,2480 ; 2632,-354 2632,132 2699,199 2699,1488 2632,1555 2632,2480 ; 2632,-354 -1505,-354 -1505,2480 2632,2480

## Text inside footprints (layer, text, board x,y; h text height)
Designator1: Top Overlay "3" at 1036,-46 h31 r180
Designator2: Top Overlay "2" at 1459,-38 h31 r180
Designator4: Top Overlay "8" at 1865.6,2169 h31 r270; Top Overlay "2" at 2166.2,2169 h31 r270; Bottom Overlay "8" at 1865.6,2169 h31 r270; Bottom Overlay "2" at 2166.2,2169 h31 r270